# Altium PCB imuver3.PcbDoc
Units mm, origin at the board's own origin, x right, y up, seen from the top; angles counter-clockwise.
Board outline 58.29 x 47.24 mm, 2 copper layers (Top Layer, Bottom Layer); 68 components, 50 nets, 317 pads, 53 vias.
Unrouted connection lines stored in the file: 10.
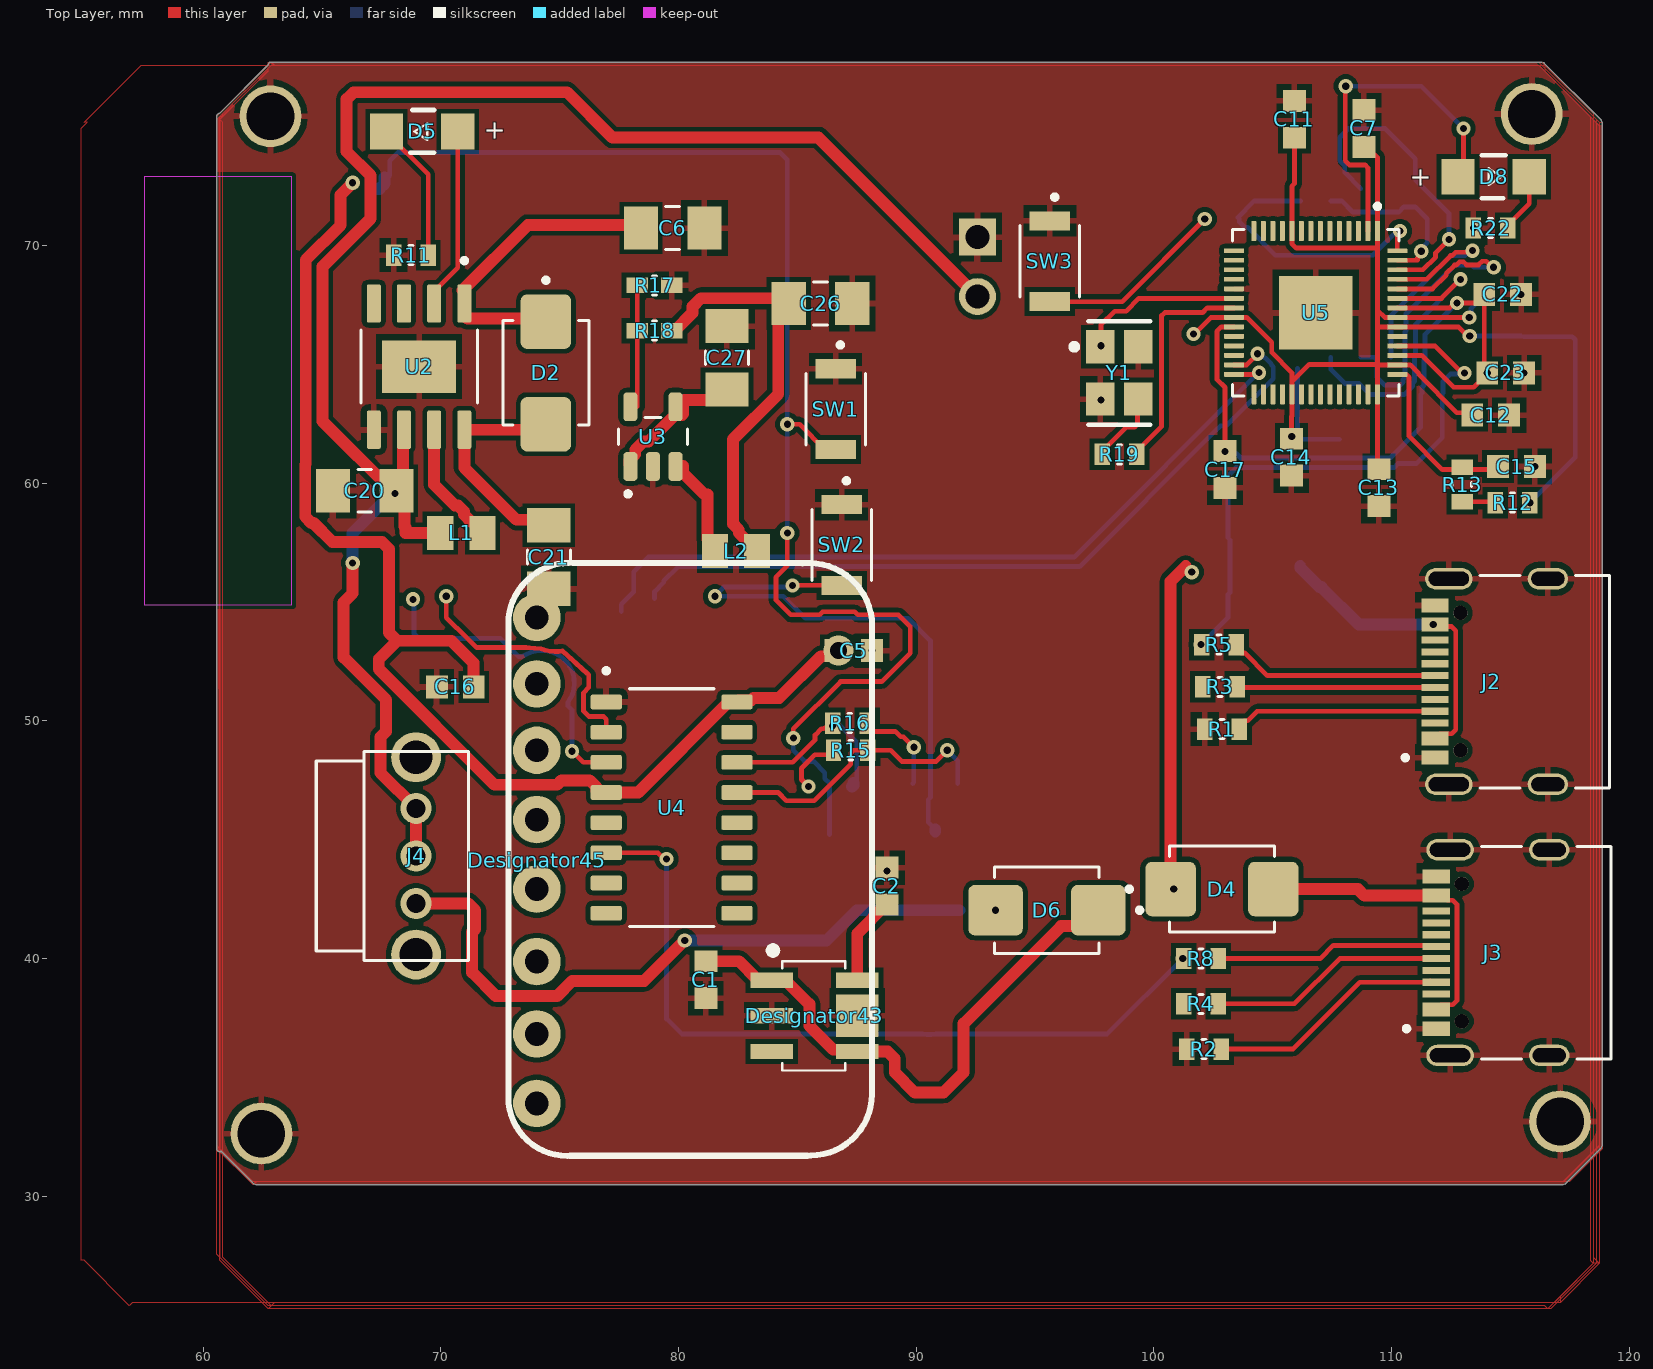
[diagram p0: Top Layer view]
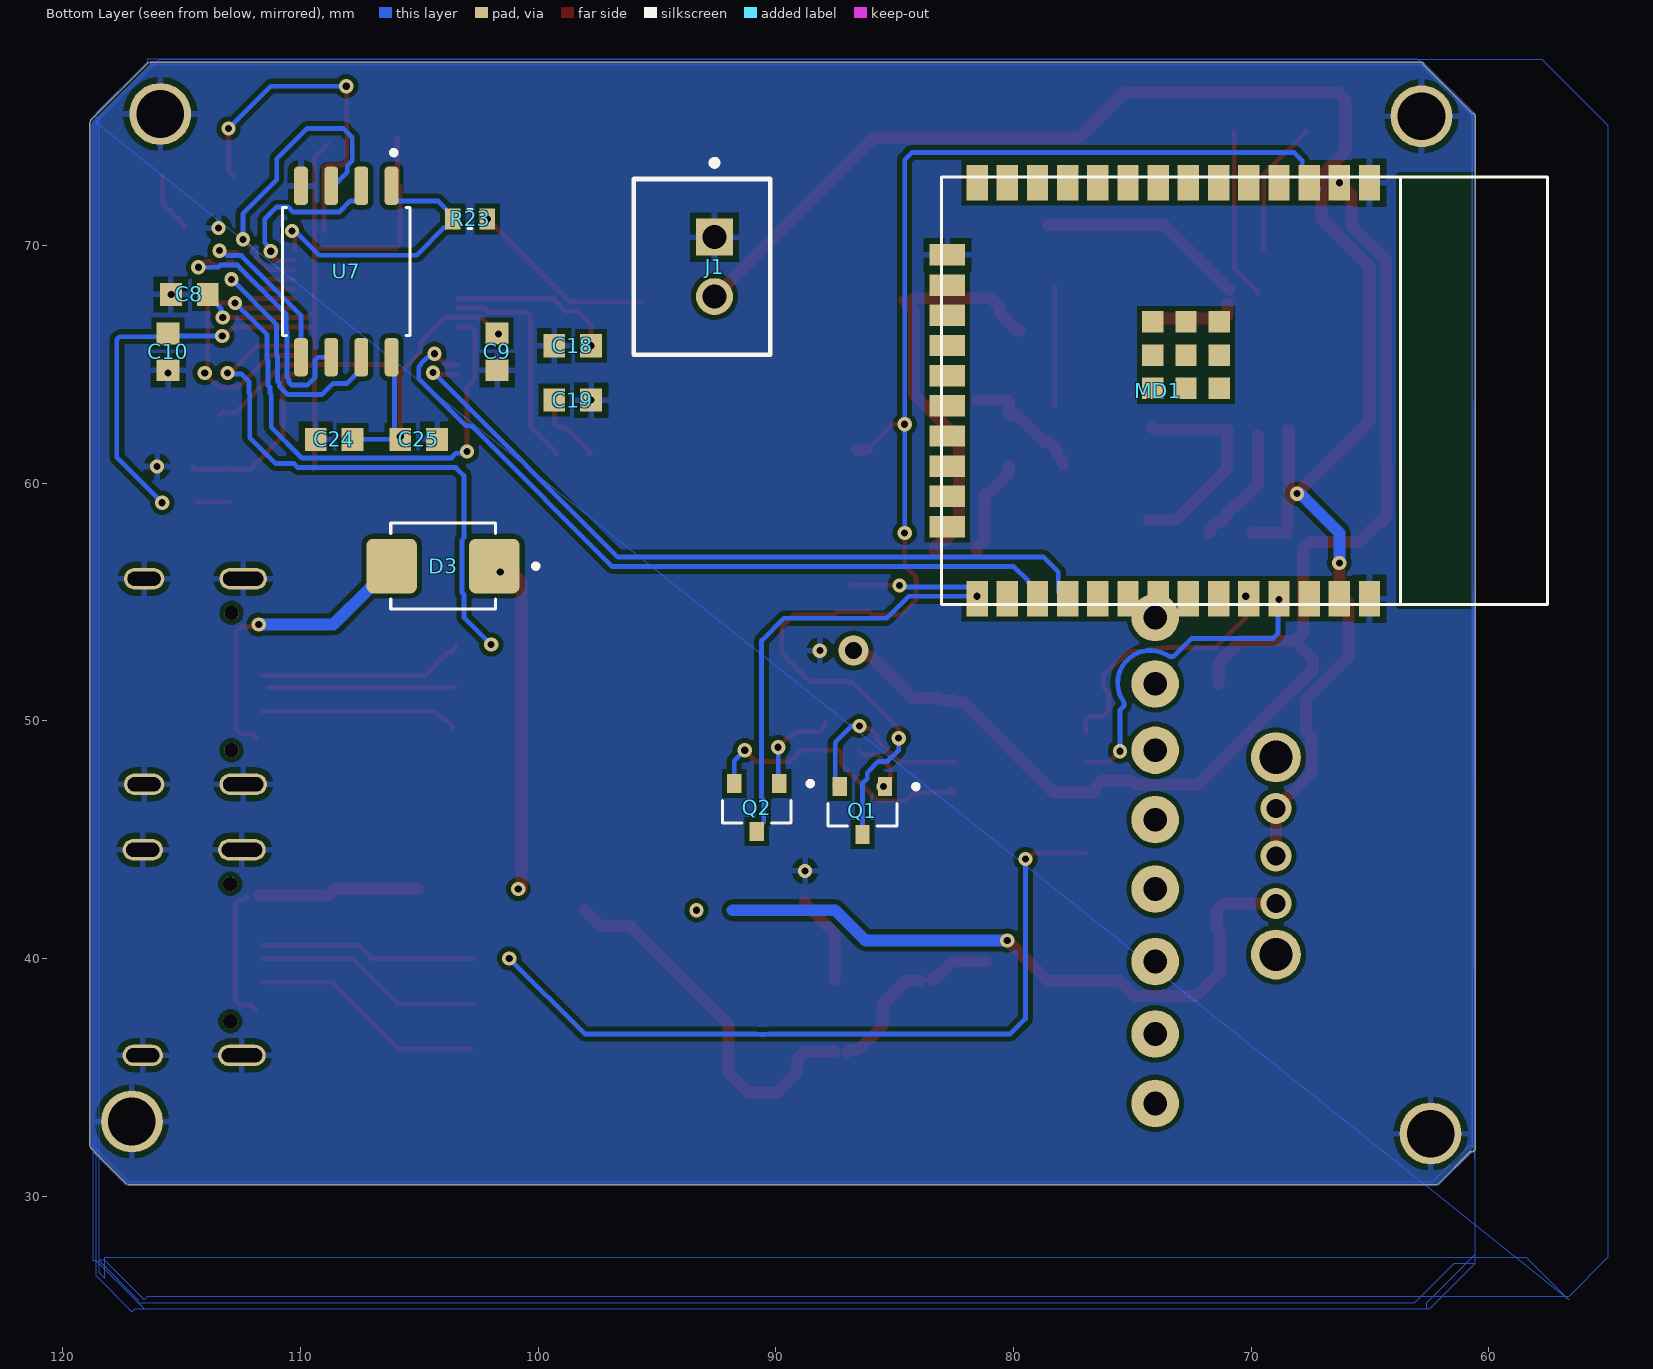
[diagram p1: Bottom Layer view, seen from below]
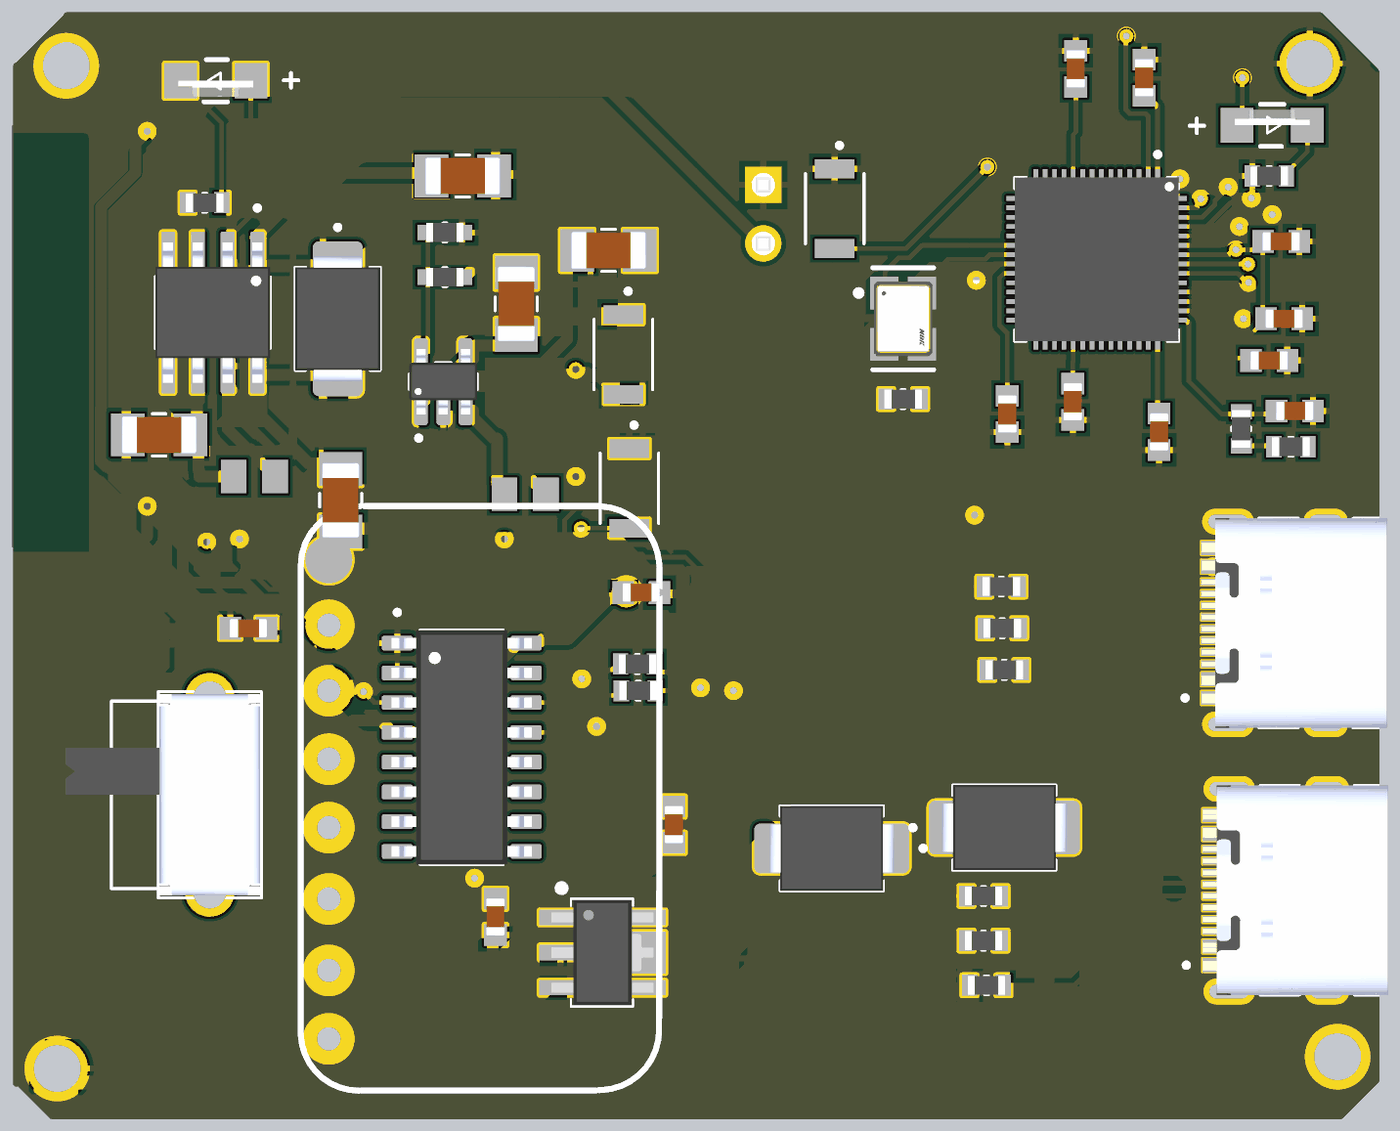
[diagram p2: 3D render of the assembled board from above, using the file's embedded part models]
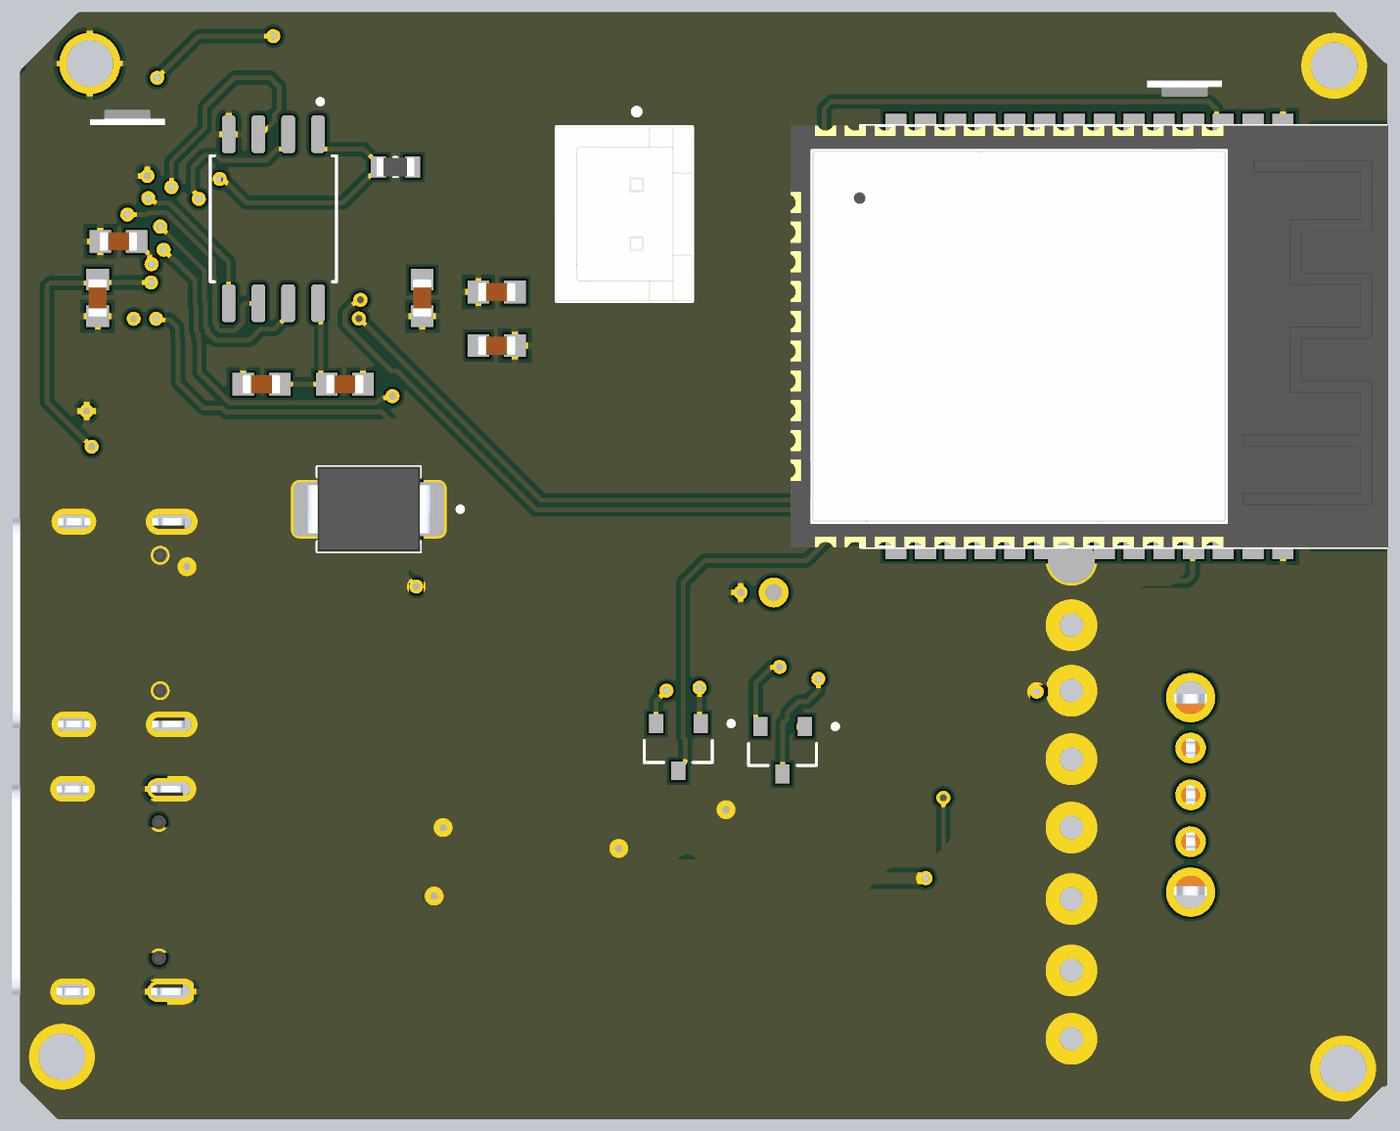
[diagram p3: 3D render of the assembled board from below, using the file's embedded part models]

## Layer stack, top to bottom
Top Solder: solder mask 0.0102, Solder Resist, Dk 3.5
Top Layer: signal copper 0.0356
Dielectric 1: dielectric 0.32, FR-4, Dk 4.8
Bottom Layer: signal copper 0.0356
Bottom Solder: solder mask 0.0102, Solder Resist, Dk 3.5

## Board outline
60.765,31.891 62.14,30.517 62.23,30.48 62.611,30.48 62.738,30.48 116.713,30.48 117.221,30.48 117.311,30.517 118.835,32.041 118.872,32.131 118.872,33.909 118.872,75.184 118.835,75.274 116.422,77.687 116.332,77.724 62.865,77.724 ccw(c62.865,77.597) 62.739,77.613 60.69,75.564 ccw(c60.706,75.438) 60.579,75.438 60.579,35.052 60.579,32.004 ccw(c60.706,32.004)

## Design rules (kind name [scope] priority, off if disabled: settings)
Clearance [All] p1: gap=0.2 ignorepadtopadclearanceinfootprint=FALSE
PolygonConnect [All] p1: connectstyle=Relief reliefconductorwidth=0.254 reliefentries=4 polygonreliefangle="90 Angle" airgapwidth=0.254
RoutingVias [All] p1: holewidth=0.711 width=1.27 viastyle="Through Hole" minholewidth=0.711 minwidth=1.27 maxholewidth=0.711 maxwidth=1.27
SolderMaskExpansion [All] p1: expansion=0.102 istentingtop=FALSE
Width [All] p1: maxlimit=0.5 minlimit=0.2 preferedwidth=0.2 minimp=50.000000 maximp=50.000000 favimp=50.000000
30 further rules are at their usual default settings.

## Classes and differential pairs
component class "schematic (upgrade)": C1 C2 C5 C6 C7 C8 C9 C10 C11 C12 C13 C14 C15 C16 C17 C18 C19 C20 C21 C22 C23 C24 C25 C26 C27 D2 D3 D4 D5 D8 J1 J2 J3 J4 L1 L2 MD1 Q1 Q2 R1 R2 R3 R4 R5 R8 R11 R12 R13 R15 R16 R17 R18 R19 R22 R23 SW1 SW2 SW3 U2 U3 U4 U5 U7 Y1

## Components (designator, comment, footprint, x,y, rotation, side; value= is the part's Value field where it differs from the comment)
C1 "10uF" CAPC1608X90N 81.153,39.116 r90 top
C2 "10uF" CAPC1608X90N 88.773,43.053 r270 top
C5 "100nF" CAPC1608X90N 87.376,52.959 r0 top
C6 "10uF" CAPC3216X190N 79.756,70.739 r180 top
C7 "100nF" CAPC1608X90N 108.839,74.93 r90 top
C8 "100nF" CAPC1608X90N 114.681,67.945 r0 bottom
C9 "100nF" CAPC1608X90N 101.727,65.532 r270 bottom
C10 "100nF" CAPC1608X90N 115.57,65.532 r270 bottom
C11 "100nF" CAPC1608X90N 105.918,75.311 r90 top
C12 "100nF" CAPC1608X90N 114.173,62.865 r0 top
C13 "100nF" CAPC1608X90N 109.474,59.817 r270 top
C14 "2.2uF" CAPC1608X90N 105.791,61.1 r90 top
C15 "2.2uF" CAPC1608X90N 115.263,60.706 r180 top
C16 "100nF" CAPC1608X90N 70.612,51.435 r0 top
C17 "2.2uF" CAPC1608X90N 102.997,60.579 r270 top
C18 "15pF" CAPC1608X90N 98.552,65.786 r0 bottom
C19 "15pF" CAPC1608X90N 98.552,63.5 r180 bottom
C20 "22uF" CAPC3216X190N 66.802,59.69 r0 top
C21 "22uF" CAPC3216X190N 74.549,56.896 r90 top
C22 "100nF" CAPC1608X90N 114.681,67.945 r0 top
C23 "100nF" CAPC1608X90N 114.808,64.643 r0 top
C24 "2.2uF" CAPC1608X90N 108.585,61.849 r180 bottom
C25 "100nF" CAPC1608X90N 105.029,61.849 r180 bottom
C26 "22uF" CAPC3216X190N 85.979,67.564 r0 top
C27 "22uF" CAPC3216X190N 82.042,65.278 r270 top
D2 "SS24" DIOM5336X265N#1 74.422,64.643 r270 top
D3 "SS24" DIOM5336X265N#2 104.005,56.515 r0 bottom
D4 "SS24" DIOM5336X265N#2 102.87,42.926 r0 top
D5 "PWR LED" WL-SMCW_1206 69.215,74.803 r0 top
D6 "SS24" DIOM5336X265N#1 95.504,42.037 r180 top
D8 "PWR LED" WL-SMCW_1206 114.3,72.898 r180 top
Designator43 "XC6222B331PR-G" SOT-89-5 85.725,37.592 r270 top
Designator45 "Comment" PCBComponent_1#1 84.963,42.672 r270 top
J1 "B2B-XH-A(LF)(SN)" FP-B2B-XH-A_LF_SN-MFG 93.108,69.108 r270 bottom
J2 "TYPE-C-31-M-12" HRO_TYPE-C-31-M-12 116.583,51.658 r90 top
J3 "TYPE-C-31-M-12" HRO_TYPE-C-31-M-12 116.637,40.255 r90 top
J4 "SK12D07VG4" SK12D07VG4 68.961,44.323 r270 top
L1 "2.2uH" INDC2012X55N 70.866,57.912 r180 top
L2 "2.2uH" INDC2012X55N 82.423,57.15 r0 top
MD1 "ESP32-WROOM-32E(M113EH3200PH3Q0)" ESP32-WROOM-32E 73.279,63.894 r270 bottom
MD2 "Module BNO055" PCBComponent_1#2 179.324,42.545 r90 top
Q1 "SS8050-G" TRANS_SS8050-G 86.36,46.228 r270 bottom
Q2 "SS8050-G" TRANS_SS8050-G 90.805,46.355 r270 bottom
R1 "5K1" RES_ERJU03J5R6V#1 102.87,49.657 r0 top
R2 "5K1" RES_ERJU03J5R6V#1 102.108,36.195 r0 top
R3 "22R" RES_ERJU03J5R6V#1 102.78,51.435 r0 top
R4 "22R" RES_ERJU03J5R6V#1 101.981,38.1 r0 top
R5 "22R" RES_ERJU03J5R6V#1 102.743,53.213 r0 top
R8 "22R" RES_ERJU03J5R6V#1 101.981,40.005 r0 top
R11 "1K" RES_ERJU03J5R6V#1 68.744,69.596 r180 top
R12 "200R" RES_ERJU03J5R6V#1 115.099,59.182 r180 top
R13 "1R" RES_ERJU03J5R6V#1 112.977,59.944 r90 top
R15 "10K" RES_ERJU03J5R6V#1 87.249,48.768 r180 top
R16 "10K" RES_ERJU03J5R6V#1 87.212,49.911 r0 top
R17 "100k" RES_ERJU03J5R6V#2 78.994,68.326 r180 top
R18 "453k" RES_ERJU03J5R6V#2 78.994,66.421 r0 top
R19 "1K" RES_ERJU03J5R6V#1 98.552,61.214 r180 top
R22 "pp" RES_ERJU03J5R6V#1 114.173,70.739 r180 top
R23 "1K" RES_ERJU03J5R6V#1 102.87,71.12 r0 bottom
SW1 "B3U-1000P" SW_B3U-1000P 86.614,63.119 r270 top
SW2 "B3U-1000P" SW_B3U-1000P 86.868,57.404 r270 top
SW3 "B3U-1000P" SW_B3U-1000P 95.631,69.342 r270 top
U2 "IP5306" SOP127P600X165-9N 69.088,64.909 r270 top
U3 "TLV62568DBVR" SOT95P280X145-5N 78.928,61.961 r90 top
U4 "CH340C" SOIC127P600X180-16N 79.712,46.355 r0 top
U5 "RP2040" QFN40P700X700X90-57N 106.813,67.18 r270 top
U7 "W25Q16JVSSIQ" SOIC127P790X216-8N 108.077,68.912 r270 bottom
Y1 "NX3225SA-12.000M-STD-CRS-2" FP-NX3225SA-MFG 98.552,64.643 r270 top

## Footprints (in the part's own frame and the unit in brackets; to place one, negate y for a bottom-side part, rotate by r counter-clockwise, add the part's x,y. Pads: shape width x height; smd on the part's side, far side on the other; paste and mask are expansions set on the pad)
CAPC1608X90N [mm]
  rect 0.92x0.97 smd: 1(-0.775,0) 2(0.775,0)
  body extent -0.8,-0.4 0.8,0.4, height 0.95
CAPC3216X190N [mm]
  rect 1.44x1.82 smd: 1(-1.336,0) 2(1.336,0)
  silkscreen extent -0.29,-0.9 0.29,0.9, body extent -1.6,-0.8 1.6,0.8, height 1.9
DIOM5336X265N#1 [mm]
  rrect25% 2.29x2.12 smd: A(2.16,0) C(-2.16,0)
  silkscreen extent -4,-1.81 2.2,1.81, body extent -2.67,-1.81 2.67,1.81, height 2.65
DIOM5336X265N#2 [mm]
  rrect25% 2.12x2.29 smd: A(2.16,0) C(-2.16,0)
  silkscreen extent -4,-1.81 2.2,1.81, body extent -2.67,-1.81 2.67,1.81, height 2.65
ESP32-WROOM-32E [mm]
  rect 1.5x0.9 smd paste+0 mask+0.102: 1(-8.75,8.255) 2(-8.75,6.985) 3(-8.75,5.715) 4(-8.75,4.445) 5(-8.75,3.175) 6(-8.75,1.905) 7(-8.75,0.635) 8(-8.75,-0.635) 9(-8.75,-1.905) 10(-8.75,-3.175) 11(-8.75,-4.445) 12(-8.75,-5.715) 13(-8.75,-6.985) 14(-8.75,-8.255) 25(8.75,-8.255) 26(8.75,-6.985) 27(8.75,-5.715) 28(8.75,-4.445) 29(8.75,-3.175) 30(8.75,-1.905) 31(8.75,-0.635) 32(8.75,0.635) 33(8.75,1.905) 34(8.75,3.175) 35(8.75,4.445) 36(8.75,5.715) 37(8.75,6.985) 38(8.75,8.255)
  rect 0.9x1.5 smd paste+0 mask+0.102: 15(-5.715,-9.505) 16(-4.445,-9.505) 17(-3.175,-9.505) 18(-1.905,-9.505) 19(-0.635,-9.505) 20(0.635,-9.505) 21(1.905,-9.505) 22(3.175,-9.505) 23(4.445,-9.505) 24(5.715,-9.505)
  rect 0.9x0.9 smd paste+0 mask+0.102: GND@39(-2.9,1.935) GND@40(-1.5,1.935) GND@41(-0.1,1.935) GND@42(-2.9,0.535) GND@43(-1.5,0.535) GND@44(-0.1,0.535) GND@45(-2.9,-0.865) GND@46(-1.5,-0.865) GND@47(-0.1,-0.865)
  Keep-Out Layer region: 9,9.555 -9,9.555 -9,15.745 9,15.745
  silkscreen extent -9,-9.75 9,15.75, body extent -9,-12.75 9,12.75, height 3.25
FP-B2B-XH-A_LF_SN-MFG [mm]
  rect 1.55x1.55 hole 1 paste-2539.97 mask+0: 1(-1.25,0.525)
  round 1.55 hole 1 paste-2539.97 mask+0: 2(1.25,0.525)
  silkscreen extent -4.5,-2.88 3.7,2.88, body extent -3.7,-2.88 3.7,2.88, height 7
FP-NX3225SA-MFG [mm]
  rect 1.4x1.2 smd paste+0 mask+0: 1(-1.1,-0.8) 2(1.1,-0.8) 3(1.1,0.8) 4(-1.1,0.8)
  silkscreen extent -2.17,-2.02 2.17,1.3, body extent -1.9,-1.5 1.9,1.5, height 0.25
HRO_TYPE-C-31-M-12 [mm]
  rect 0.6x1.14 smd mask+0.05: A1_B12(-3.2,4.75) A4_B9(-2.4,4.75) B1_A12(3.2,4.75) B4_A9(2.4,4.75)
  rect 0.3x1.14 smd mask+0.05: A5(-1.25,4.75) A6(-0.25,4.75) A7(0.25,4.75) A8(1.25,4.75) B5(1.75,4.75) B6(0.75,4.75) B7(-0.75,4.75) B8(-1.75,4.75)
  oval 0.9x2 hole 0.6 slot 1.7 at 90 deg: S1(-4.325,4.17) S2(4.325,4.17)
  oval 0.9x1.7 hole 0.6 slot 1.4 at 90 deg: S3(-4.325,0) S4(4.325,0)
  round 0.6 hole 0.6 unplated: ""(-2.89,3.68) ""(2.89,3.68)
  silkscreen extent -4.47,-2.6 4.47,6.1, body extent -4.47,-2.6 4.47,5.31, height 3.31
INDC2012X55N [mm]
  rect 1.1x1.42 smd: 1(-0.885,0) 2(0.885,0)
PCBComponent_1#1 [mm]
  round 2 hole 1 paste-2539.97: 1(-11.684,-10.922)
  round 2 hole 1: 2(-8.89,-10.922) 3(-6.096,-10.922) 4(-3.175,-10.922) 5(-0.254,-10.922) 6(2.794,-10.922) 7(5.842,-10.922) 8(8.763,-10.922)
  silkscreen extent -13.98,-12.12 10.98,3.19
PCBComponent_1#2 [mm]
QFN40P700X700X90-57N [mm]
  rrect25% 0.84x0.2 smd: 1(-3.435,2.6) 2(-3.435,2.2) 3(-3.435,1.8) 4(-3.435,1.4) 5(-3.435,1) 6(-3.435,0.6) 7(-3.435,0.2) 8(-3.435,-0.2) 9(-3.435,-0.6) 10(-3.435,-1) 11(-3.435,-1.4) 12(-3.435,-1.8) 13(-3.435,-2.2) 14(-3.435,-2.6) 29(3.435,-2.6) 30(3.435,-2.2) 31(3.435,-1.8) 32(3.435,-1.4) 33(3.435,-1) 34(3.435,-0.6) 35(3.435,-0.2) 36(3.435,0.2) 37(3.435,0.6) 38(3.435,1) 39(3.435,1.4) 40(3.435,1.8) 41(3.435,2.2) 42(3.435,2.6)
  rrect25% 0.2x0.84 smd: 15(-2.6,-3.435) 16(-2.2,-3.435) 17(-1.8,-3.435) 18(-1.4,-3.435) 19(-1,-3.435) 20(-0.6,-3.435) 21(-0.2,-3.435) 22(0.2,-3.435) 23(0.6,-3.435) 24(1,-3.435) 25(1.4,-3.435) 26(1.8,-3.435) 27(2.2,-3.435) 28(2.6,-3.435) 43(2.6,3.435) 44(2.2,3.435) 45(1.8,3.435) 46(1.4,3.435) 47(1,3.435) 48(0.6,3.435) 49(0.2,3.435) 50(-0.2,3.435) 51(-0.6,3.435) 52(-1,3.435) 53(-1.4,3.435) 54(-1.8,3.435) 55(-2.2,3.435) 56(-2.6,3.435)
  rect 3.1x3.1 smd paste-0.57: 57(0,0)
  silkscreen extent -4.57,-3.5 3.5,3.5, body extent -3.5,-3.5 3.5,3.5, height 0.9
RES_ERJU03J5R6V#1 [mm]
  rect 0.65x0.9 smd paste+0 mask+0.102: 1(-0.725,0) 2(0.725,0)
  silkscreen extent -0.08,-0.4 0.08,0.4, body extent -0.8,-0.4 0.8,0.4, height 0.45
RES_ERJU03J5R6V#2 [mm]
  rect 0.9x0.65 smd paste+0 mask+0.102: 1(-0.725,0) 2(0.725,0)
  silkscreen extent -0.08,-0.4 0.08,0.4, body extent -0.8,-0.4 0.8,0.4, height 0.45
SK12D07VG4 [mm]
  round 1.308 hole 0.8: 1(-2,0) 2(2,0) COM(0,0)
  round 2.1 hole 1.4: M1(-4.15,0) M2(4.15,0)
  silkscreen extent -4.4,-4.2 4.4,2.2, body extent -4.3,-6.15 4.3,2.15, height 4.7
SOIC127P600X180-16N [mm]
  rrect25% 1.31x0.62 smd: 1(-2.75,4.445) 2(-2.75,3.175) 3(-2.75,1.905) 4(-2.75,0.635) 5(-2.75,-0.635) 6(-2.75,-1.905) 7(-2.75,-3.175) 8(-2.75,-4.445) 9(2.75,-4.445) 10(2.75,-3.175) 11(2.75,-1.905) 12(2.75,-0.635) 13(2.75,0.635) 14(2.75,1.905) 15(2.75,3.175) 16(2.75,4.445)
  silkscreen extent -2.85,-5 1.78,5.85, body extent -3,-5 3,5, height 1.8
SOIC127P790X216-8N [mm]
  rrect50% 1.61x0.58 smd: 1(-3.605,1.905) 2(-3.605,0.635) 3(-3.605,-0.635) 4(-3.605,-1.905) 5(3.605,-1.905) 6(3.605,-0.635) 7(3.605,0.635) 8(3.605,1.905)
  silkscreen extent -5.1,-2.69 2.69,2.69
SOP127P600X165-9N [mm]
  rrect25% 1.61x0.59 smd: 1(-2.655,1.905) 2(-2.655,0.635) 3(-2.655,-0.635) 4(-2.655,-1.905) 5(2.655,-1.905) 6(2.655,-0.635) 7(2.655,0.635) 8(2.655,1.905)
  rect 2.21x3.1 smd paste-3: 9(0,0)
  silkscreen extent -4.56,-2.45 1.53,2.45, body extent -3,-2.45 3,2.45, height 1.65
SOT95P280X145-5N [mm]
  rrect50% 1.21x0.59 smd: 1(-1.255,0.95) 2(-1.255,0) 3(-1.255,-0.95) 4(1.255,-0.95) 5(1.255,0.95)
  silkscreen extent -2.51,-1.45 0.8,1.45, body extent -1.4,-1.45 1.4,1.45, height 1.45
SOT-89-5 [mm]
  rect 0.65x1.8 smd: 1(-1.5,-1.8) 2(0,-1.8) 3(1.5,-1.8) 4(1.5,1.8) 5(-1.5,1.8)
  rect 1.8x1.8 smd: EP(0,1.8)
  silkscreen extent -3.05,-2.05 2.3,1.3, body extent -2.25,-2.17 2.25,2.17, height 1.5
SW_B3U-1000P [mm]
  rect 0.8x1.7 smd: 1(-1.7,0) 2(1.7,0)
  silkscreen extent -2.8,-1.25 1.5,1.25
TRANS_SS8050-G [mm]
  rect 0.8x0.6 smd: 1(-1.01,0.95) 2(-1.01,-0.95) 3(1.01,0)
  silkscreen extent -1.11,-1.45 0.65,2.35
WL-SMCW_1206 [mm]
  rect 1.4x1.5 smd: 1(-1.5,0) 2(1.5,0)
  silkscreen extent -0.5,-0.9 0.5,0.9, body extent -1.6,-0.68 1.6,0, height 0.8

## Part data
C1 C2 C5 C7 C8 C9 C10 C11 C12 C13 C14 C15 C16 C17 C18 C19 C22 C23 C24 C25: library part C0603C104K4RAC, "0.1 ÂµF Â±10% 16V Ceramic Capacitor X7R 0603 (1608 Metric)", Package="603-2 KEMET", Check_prices=https://www.snapeda.com/parts/C0603C104K4RAC/KEMET/view-part/?ref=eda, MF=KEMET, MP=C0603C104K4RAC, SnapEDA_Link=https://www.snapeda.com/parts/C0603C104K4RAC/KEMET/view-part/?ref=snap
C6 C20 C21 C26 C27: library part CGA5L1X8L0G226M160AC, "22 ÂµF Â±20% 4V Ceramic Capacitor X8L 1206 (3216 Metric)", Package="3216 TDK", Check_prices=https://www.snapeda.com/parts/CGA5L1X8L0G226M160AC/TDK/view-part/?ref=eda, MF=TDK, MP=CGA5L1X8L0G226M160AC, SnapEDA_Link=https://www.snapeda.com/parts/CGA5L1X8L0G226M160AC/TDK/view-part/?ref=snap
D2 D3 D4 D6: "Diode Schottky 40V 2A Surface Mount DO-214AA (SMB)", Package="DO-214AA ON Semiconductor", Availability="In Stock", Check_prices=https://www.snapeda.com/parts/SS24/Onsemi/view-part/?ref=eda, MF="ON Semiconductor", MP=SS24, Price=None, SnapEDA_Link=https://www.snapeda.com/parts/SS24/Onsemi/view-part/?ref=snap
D5 D8: library part WL-SMCW_1206, "1206, Super Red Typ.(@20mA): 630nm, 60mcd, 1.9V, 140Â° AlInGaP", Package="1206 Wurth Electronics", Check_prices=https://www.snapeda.com/parts/150120SS75000/Wurth+Electronics/view-part/?ref=eda, MF="Wurth Electronics", MP=150120SS75000, SnapEDA_Link=https://www.snapeda.com/parts/150120SS75000/Wurth+Electronics/view-part/?ref=snap
J1: library part CMP-2000-05888-3, "CONN HEADER VERT 2POS 2.5MM", Color=Natural, Contact Resistance=20mR, Current Rating=3A, Housing Color=White, Insulation Resistance=1GR, Max Operating Temperature=85°C, Max Voltage Rating (AC)=250V, Min Operating Temperature=-25°C, Connector Type="Male Pin", Contact Material=Brass, Contact Plating=Tin, Contact Type="Male Pin", Depth=5.75mm, Fastening Type=Detent, Housing Material=Polyamide, Lead Free="Lead Free", Lead Pitch=2.5mm, Length=7.4mm, Max Current Rating=3A, Max Voltage Rating (DC)=250V, Mount="Through Hole", Number of Contacts=2, Number of Positions=2, Number of Rows=1, Orientation=Straight, Packaging=Bulk, Pitch=2.5mm, REACH SVHC="No SVHC", Series=XH, Termination=Solder, Voltage Rating=250V, Voltage Rating (AC)=250V, Wire/Cable Gauge=22AWG
J2 J3: "USB Connectors 24 Receptacle 1 8.94*7.3mm RoHS", Package=Package, Check_prices=https://www.snapeda.com/parts/TYPE-C-31-M-12/HRO+Electronics+Co.%252C+Ltd./view-part/?ref=eda, MF="HRO Electronics Co., Ltd.", MP=TYPE-C-31-M-12, SnapEDA_Link=https://www.snapeda.com/parts/TYPE-C-31-M-12/HRO+Electronics+Co.%252C+Ltd./view-part/?ref=snap
J4: "Switch Slide ON ON SPDT Side Slide 0.3A 30VDC PC Pins Bracket Mount/Through Hole Bulk", Package=None, Check_prices=https://www.snapeda.com/parts/SK12D07VG4/C%2526K/view-part/?ref=eda, MF=C&K, MP=SK12D07VG4, SnapEDA_Link=https://www.snapeda.com/parts/SK12D07VG4/C%2526K/view-part/?ref=snap
L1 L2: library part LQM21PN2R2MCHD, "Inductor with Inductance: 2.2uH Tol. +/-20%, Package: 0805 _2012_", Package="2012 Bourns", Digi-Key_Part_Number=490-15992-1-ND, Digi-Key_Purchase_URL=https://www.digikey.com/product-detail/en/murata-electronics/LQM21PN2R2MCHD/490-15992-1-ND/6800657?utm_source=snapeda&utm_medium=aggregator&utm_campaign=symbol, MF=Murata, MP=LQM21PN2R2MCHD, SnapEDA_Link=https://www.snapeda.com/parts/LQM21PN2R2MCHD/Murata%20Electronics%20North%20America/view-part/1498675/?ref=snap
MD1: library part CMP-194065-000012-1, "RX TXRX MOD WIFI TRACE ANT SMD"
MD2: library part Component_1, "Module 9 DOF BNO055 by Adafruit"
Q1 Q2: "Bipolar (BJT) Transistor NPN 25 V 1.5 A 100MHz 300 mW Surface Mount SOT-23-3", Package=None, Check_prices=https://www.snapeda.com/parts/SS8050G/Comchip/view-part/?ref=eda, Digi-Key_Part_Number=641-1790-2-ND, MF=Comchip, MP=SS8050G, SnapEDA_Link=https://www.snapeda.com/parts/SS8050G/Comchip/view-part/?ref=snap
R1 R2 R3 R4 R5 R8 R11 R12 R13 R15 R16 R17 R18 R19 R22 R23: library part ERJU03J5R6V, "0201 anti-sulfurated resistor 0603 Anti-Sulfurated", Package="1608-2 Panasonic", Check_prices=https://www.snapeda.com/parts/ERJ-U03J5R6V/Panasonic/view-part/?ref=eda, MF=Panasonic, MP=ERJ-U03J5R6V, SnapEDA_Link=https://www.snapeda.com/parts/ERJ-U03J5R6V/Panasonic/view-part/?ref=snap
SW1 SW2 SW3: "Switch Tactile N.O. SPST Round Button Gull Wing 0.05A 12VDC 1.5N SMD Embossed T/R", Package=None, Availability=Unavailable, MP=B3U-1000P, Price=None
U2: "Fully-Integrated Power Bank System-On-Chip with 2.1A charger, 2.4A discharger", Package="SOIC-4 INJOINIC", Check_prices=https://www.snapeda.com/parts/IP5306/Injoinic/view-part/?ref=eda, MF=Injoinic, MP=IP5306, SnapEDA_Link=https://www.snapeda.com/parts/IP5306/Injoinic/view-part/?ref=snap
U3: "2.5V-5.5V input, 1A high efficiency step-down buck converter in SOT23 and SOT563 package", Package="SOT-23-5 Texas Instruments", Check_prices=https://www.snapeda.com/parts/TLV62568DBVR/Texas+Instruments/view-part/?ref=eda, MF="Texas Instruments", MP=TLV62568DBVR, SnapEDA_Link=https://www.snapeda.com/parts/TLV62568DBVR/Texas+Instruments/view-part/?ref=snap
U4: "USB to serial chip CH340", Package=None, Availability="Not in stock", Check_prices=https://www.snapeda.com/parts/CH340C/WCH/view-part/?ref=eda, MF=WCH, MP=CH340C, Price=None, SnapEDA_Link=https://www.snapeda.com/parts/CH340C/WCH/view-part/?ref=snap
U5: "RP2040 chip for Raspberry Pi Pico - ARM® Cortex®-M0+ MCU 32-Bit", Package=None, Check_prices=https://www.snapeda.com/parts/RP2040/Raspberry+Pi/view-part/?ref=eda, MF="Raspberry Pi", MP=RP2040, SnapEDA_Link=https://www.snapeda.com/parts/RP2040/Raspberry+Pi/view-part/?ref=snap
U7: Package=None, Availability=Unavailable, MF="{'manufacturer': u'Winbond Electronics'}", MP=W25Q16JVSSIQ, Price=None
Y1: library part CMP-200220-000016-1, Case/Package=SMD/SMT, ESR (Equivalent Series Resistance)=120R, Frequency=12MHz, Frequency Stability=50ppm, Frequency Tolerance=15ppm, Load Capacitance=8pF, Max Operating Temperature=125°C, Min Operating Temperature=-40°C, Ratings=AEC-Q200, Height=0.024inch, Length=0.126inch, Mount="Surface Mount", Packaging="Tape and Reel", RoHS Compliant=Yes, Width=0.098inch

## Free pads (board coordinates)
  round 2.6 hole 2: 1(62.836,75.44) 2(62.455,32.641) 4(115.905,75.538) PG(117.094,33.147)

## Via types
v1: diameter 0.6, hole 0.3, Top Layer to Bottom Layer, 52 vias
v2: diameter 1.27, hole 0.711, Top Layer to Bottom Layer, 1 vias

## Nets (pads, with @x,y where several pads share a name; then routed paths per layer and width w, separated by ;. In a path a pad name is that pad's centre, name@x,y a point inside that pad or via, vN(x,y) a via of type N, cw(c..) or ccw(c..) an arc to the next point about the centre after c; other vN are vias at no path point)
+1V1: C15.2 C17.1 C22.1 C23.1 R13.2 U5.23 U5.43 U5.45 U5.50 | length 40.4
  Top Layer w0.2: v1(102.997,61.341) C17.1 102.997,64.031 102.658,64.37 102.658,66.39 102.848,66.58 103.014,66.58 U5.23 ; U5.43 110.627,64.58 110.744,64.463 110.744,61.976 112.141,60.579 112.887,60.579 R13.2 113.067,60.579 114.554,60.579 114.488,60.645 C15.2 ; U5.45 111.276,65.38 112.613,64.043 113.458,64.043 114.046,64.631 C23.1@114.046,64.643 ; U5.50 112.443,67.38 112.754,67.691 v1@112.756,67.691 ; v1(112.756,67.584) v1@112.756,67.691 ; C22.1@113.906,67.92 113.906,64.77 v1(114.033,64.643) ; C22.1 113.546,67.584 112.863,67.584 v1@112.756,67.691
  Bottom Layer w0.2: v1(102.997,61.341) 103.074,61.264 103.469,61.264 103.67,61.064 109.944,61.064 111.233,62.353 111.233,63.747 111.29,63.804 111.29,64.049 111.372,64.131 111.372,65.18 111.417,65.225 111.417,66.274 112.307,67.164 112.327,67.164 112.747,67.584 v1(112.756,67.584)
+3V3: C2.2 C7.1 C8.1 C9.1 C10.1 C11.1 C12.1 C13.1 C14.2 C24.2 C25.1 Designator43.5 R12.1 U5.1 U5.10 U5.22 U5.33 U5.42 U5.44 U5.48 U5.49 U7.8 | length 69.5
  Top Layer w0.2: v1(101.675,66.286) 101.719,66.286 102.413,66.98 U5.22 103.908,66.98 104.963,65.925 104.963,65.506 105.813,64.656 105.813,64.275 ; C14.2 105.791,62.813 105.813,62.835 U5.33 105.813,64.275 ; C11.1 105.918,72.608 105.813,72.503 U5.10 105.813,70.085 106.003,69.895 109.331,69.895 109.413,69.977 ; C7.1@108.839,74.282 109.413,73.708 U5.1 109.413,69.977 ; 109.413,64.928 U5.42 109.413,60.653 C13.1 ; 109.465,64.98 110.793,64.98 111.144,64.629 111.144,64.581 112.755,62.969 113.294,62.969 C12.1 ; v1(113.272,66.973) 113.265,66.98 U5.49 109.718,66.98 109.413,67.285 ; v1(113.293,66.193) 113.208,66.193 112.821,66.58 U5.48 109.508,66.58 109.413,66.675 ; 105.813,64.275 106.541,65.003 109.413,65.003 109.413,66.675 ; 109.413,66.675 109.413,67.285 ; 109.413,67.285 109.413,69.977
  Top Layer w0.5: Designator43.5 87.525,41.055 88.773,42.303 C2.2@88.773,42.418
  Bottom Layer w0.2: U7.8@106.045,64.83 106.045,62.09 C25.1 C24.2 ; v1(113.272,66.973) 113.349,67.05 113.349,67.363 113.906,67.92 C8.1 ; v1(113.293,66.193) C10.1@115.456,66.193 ; C10.1@115.57,66.167 117.612,66.167 117.729,66.05 117.729,61.087 v1(115.824,59.182)
  other v1: 105.804,61.976
+3V3_ESP: C5.1 C16.2 C26.1 L2.2 MD1.2 R18.2 U4.4 U4.16 | length 70.6
  Top Layer w0.2: U4.16@82.117,50.8 U4.16
  Top Layer w0.5: v1(66.294,72.644) 65.786,72.136 65.786,70.866 64.319,69.399 64.319,60.809 64.296,60.786 64.296,58.594 64.56,58.33 64.645,58.33 65.444,57.531 67.525,57.531 67.818,57.238 67.818,53.721 68.164,53.375 ; C16.2@71.374,51.562 71.374,52.451 70.45,53.375 68.164,53.375 ; R18.2 79.844,66.421 80.592,67.169 80.592,67.43 80.946,67.784 84.173,67.784 84.455,67.502 C26.1@84.455,67.437 ; U4.16@82.117,50.8 78.307,46.99 U4.4 76.617,46.99 76.557,47.05 76.557,47.207 76.264,47.5 75.078,47.5 74.896,47.318 72.259,47.318 67.39,52.187 67.39,52.601 68.164,53.375 ; U4.16 82.522,50.86 83.052,50.86 83.16,50.968 84.242,50.968 85.998,52.724 86.391,52.724 v1(86.601,52.934) 86.716,52.934 v2(86.741,52.959) ; L2.2 83.308,57.31 83.008,57.61 82.848,57.61 82.538,57.92 82.538,58.046 82.296,58.288 82.296,61.849 84.201,63.754 84.201,67.31 C26.1@84.391,67.501 ; C26.1@84.549,67.658 C26.1@84.582,67.691
+5V: C1.2 C6.2 D2.C D3.C D4.C D6.C Designator43.1 Designator43.4 U2.1 | length 49.9
  Top Layer w0.5: U2.1@70.915,68.121 73.66,70.866 C6.2@78.547,70.866 ; U2.1 70.993,67.054 71.118,66.929 D2.C@74.295,66.929 ; C1.2 82.551,39.891 83.326,39.116 Designator43.1@83.439,39.116 ; Designator43.1 84.5,39.092 85.507,38.085 85.507,37.174 86.514,36.167 86.896,36.167 Designator43.4@86.995,36.068 ; Designator43.4 87.528,36.089 88.808,36.089 89.101,35.797 89.101,35.213 89.95,34.364 91.152,34.364 92.001,35.213 92.001,37.264 96.102,41.365 97.372,41.365 D6.C@98.039,42.032 ; D4.C 100.71,55.879 101.346,56.515
  other v1: 100.838,42.926 101.6,56.261
+5V_OUT: C21.2 D2.A D6.A J4.2 U2.8 | length 36.7
  Top Layer w0.5: J4.2 71.155,42.323 71.448,42.03 71.448,41.241 71.321,41.114 71.321,39.423 72.316,38.428 74.896,38.428 75.531,39.063 78.56,39.063 v1(80.264,40.767) ; D2.A@74.168,62.357 74.065,62.254 U2.8 70.993,60.654 73.182,58.465 C21.2@74.316,58.465
  Bottom Layer w0.5: v1(80.264,40.767) 86.233,40.767 87.503,42.037 91.821,42.037
  other v1: 93.345,42.037
+BATT: C20.2 J1.2 J4.1 J4.COM L1.2 U2.6 | length 72.7
  Top Layer w0.5: v1(66.294,56.642) 66.294,55.372 65.913,54.991 65.913,52.674 67.702,50.885 67.702,49.564 67.461,49.323 67.461,47.823 J4.1 J4.COM ; C20.2@68.041,59.594 65.024,62.611 65.024,69.114 67.044,71.134 67.044,72.955 66.04,73.959 66.04,76.161 66.333,76.454 75.317,76.454 77.222,74.549 85.892,74.549 J1.2 ; C20.2@68.199,59.436 68.408,59.645 68.408,62.209 U2.6 ; C20.2@68.481,59.22 68.481,58.185 68.518,58.148 68.518,57.912 L1.2
  Bottom Layer w0.5: v1(66.294,56.642) 66.294,57.912 67.945,59.563 v1(68.072,59.563)
GND: C1.1 C2.1 C5.2 C6.1 C7.2 C8.2 C9.2 C10.2 C11.2 C12.2 C13.2 C14.1 C15.1 C16.1 C17.2 C18.2 C19.2 C20.1 C21.1 C22.2 C23.2 C24.1 C25.2 C26.2 C27.1 Designator43.2 Designator43.EP J1.1 J2.A1_B12 J2.B1_A12 J2.S1 J2.S2 J2.S3 J2.S4 J3.A1_B12 J3.B1_A12 J3.S1 J3.S2 J3.S3 J3.S4 MD1.1 MD1.15 MD1.38 pad.1 pad.2 pad.4 pad.PG R1.1 R2.1 R11.2 R17.1 R22.2 SW1.1 SW2.1 SW3.1 U2.5 U2.9 U3.2 U4.1 U5.19 U5.57 U7.4 Y1.2 Y1.4
  other v1: 88.773,43.688 88.151,52.959 116.038,60.706 97.777,63.5 115.583,64.643 115.443,67.945 113.448,70.739
NetC18_1: C18.1 U5.20 Y1.1 | length 6.9
  Top Layer w0.2: v1(97.777,65.786) 97.777,66.662 98.357,67.242 98.833,67.242 99.371,67.78 U5.20
NetC19_1: C19.1 R19.2 Y1.3 | length 3.1
  Top Layer w0.2: R19.2 97.827,61.339 98.845,62.357 99.197,62.357 99.314,62.474 Y1.3@99.314,63.5
NetC27_2: C27.2 U3.1 U3.4 | length 5.2
  Top Layer w0.5: U3.1@77.933,60.798 77.933,60.971 78.183,61.221 78.183,61.411 78.533,61.761 78.747,61.761 79.862,62.876 80.148,62.876 80.198,62.926 80.198,63.45 80.248,63.5 C27.2@81.531,63.5
NetD3_A: D3.A J2.A4_B9 J2.B4_A9 | length 12.9
  Top Layer w0.2: J2.B4_A9@111.76,53.975 112.522,53.975 112.703,53.794 112.703,49.634 112.527,49.458 112.033,49.458 J2.A4_B9
  Bottom Layer w0.5: D3.A 106.165,56.439 106.974,55.63 107.051,55.63 108.623,54.058 v1(111.76,54.058)
NetD4_A: D4.A J3.A4_B9 J3.B4_A9 | length 12.7
  Top Layer w0.2: J3.A4_B9 112.087,38.055 112.581,38.055 112.757,38.231 112.757,42.279 112.581,42.455 112.357,42.455 112.268,42.544 J3.B4_A9@112.268,42.672
  Top Layer w0.5: D4.A 108.592,42.926 108.863,42.655 111.743,42.655 J3.B4_A9@111.76,42.672
NetD5_1: D5.1 R11.1 | length 5.7
  Top Layer w0.2: D5.1 67.715,74.753 69.469,72.999 R11.1@69.469,69.85
NetD5_2: D5.2 U2.2 | length 7.3
  Top Layer w0.2: U2.2@69.723,67.945 69.723,68.074 70.715,69.066 D5.2
NetD8_1: D8.1 R22.1 | length 2.5
  Top Layer w0.2: R22.1 114.898,70.864 115.8,71.766 D8.1
NetD8_2: D8.2 U5.2 | length 14.7
  Top Layer w0.2: v1(108.077,76.708) 108.058,76.689 108.058,76.293 108.054,76.289 108.054,73.571 108.23,73.395 108.896,73.395 109.013,73.278 U5.2 ; D8.2 113.03,73.128 v1(113.03,74.93)
  Bottom Layer w0.2: v1(108.077,76.708) 111.252,76.708 v1(113.03,74.93)
NetJ2_A5: J2.A5 R1.2 | length 8.4
  Top Layer w0.2: R1.2 103.595,49.782 103.82,50.007 103.945,50.007 104.346,50.408 111.622,50.408 J2.A5@111.633,50.419
NetJ2_A6: J2.A6 R3.2 | length 7.9
  Top Layer w0.2: R3.2 103.532,51.408 111.363,51.408 111.379,51.424 J2.A6@111.379,51.435
NetJ2_A7: J2.A7 R5.2 | length 8.8
  Top Layer w0.2: R5.2 103.468,53.088 103.693,52.863 103.818,52.863 104.773,51.908 111.598,51.908 J2.A7@111.633,51.943
NetJ3_A5: J3.A5 R2.2 | length 10
  Top Layer w0.2: R2.2 105.857,36.195 108.667,39.005 111.583,39.005 J3.A5@111.633,39.055
NetJ3_A6: J3.A6 R4.2 | length 9.7
  Top Layer w0.2: R4.2 105.918,38.1 107.823,40.005 J3.A6@111.633,40.005
NetJ3_A7: J3.A7 R8.2 | length 9.2
  Top Layer w0.2: R8.2 107.007,40.005 107.557,40.555 J3.A7@111.633,40.555
NetL1_1: L1.1 U2.7 | length 5.3
  Top Layer w0.2: L1.1 L1.1@71.845,58.006
  Top Layer w0.5: U2.7@69.723,62.034 69.723,59.94 70.591,59.072 70.717,59.072 70.981,58.808 70.981,58.682 71.291,58.372 71.451,58.372 71.751,58.072 L1.1
NetL2_1: L2.1 U3.3 | length 4.2
  Top Layer w0.5: 80.198,60.726 80.198,60.426 81.087,59.537 81.22,59.537 81.22,57.628 81.538,57.31 L2.1
NetMD1_3: MD1.3 Q1.3 SW1.2 | length 58.8
  Top Layer w0.2: v1(84.582,57.912) 84.582,56.528 84.101,56.047 84.101,55.091 84.725,54.467 85.937,54.467 86.064,54.594 87.418,54.594 87.545,54.467 89.257,54.467 89.754,53.97 89.754,52.854 88.558,51.657 86.822,51.657 84.836,49.671 v1(84.836,49.276) ; v1(84.582,62.484) 85.099,62.484 SW1.2@86.164,61.419
  Top Layer w0.5: SW1.2@86.164,61.419 SW1.2
  Bottom Layer w0.2: MD1.3 67.859,72.939 67.859,73.574 68.199,73.914 84.289,73.914 84.582,73.621 v1(84.582,62.484) v1(84.582,57.912) ; v1(84.836,49.276) 84.836,48.768 85.308,48.296 85.688,48.296 86.16,47.824 86.16,47.571 86.36,47.371 Q1.3
  Bottom Layer w0.5: MD1.3@67.31,72.39 67.417,72.39 67.637,72.61 MD1.3@67.637,72.876
NetMD1_25: MD1.25 Q2.3 SW2.2 | length 23.6
  Top Layer w0.2: v1@84.808,55.711 SW2.2@86.861,55.711
  Bottom Layer w0.2: MD1.25 81.635,55.245 84.411,55.245 85.335,54.321 89.665,54.321 90.605,53.381 90.605,46.779 90.512,46.686 90.512,45.738 Q2.3@90.805,45.445 ; v1(81.534,55.245) 81.534,55.267 81.9,55.633 84.73,55.633 v1(84.801,55.704)
  Bottom Layer w0.5: Q2.3 Q2.3@90.805,45.445
NetMD1_27: MD1.27 U5.27 | length 32.7
  Top Layer w0.2: U5.27 103.908,64.98 104.365,65.438 v1(104.365,65.451)
  Bottom Layer w0.2: MD1.27 78.994,55.444 79.387,55.837 79.387,55.892 79.99,56.495 96.881,56.495 102.547,62.161 102.547,62.162 102.811,62.426 103.051,62.426 105.03,64.405 105.03,64.902 104.945,64.987 104.945,65.024 104.691,65.278 104.647,65.278 104.474,65.451 v1(104.365,65.451)
NetMD1_28: MD1.28 U5.28 | length 32.7
  Top Layer w0.2: U5.28 104.356,64.58 v1(104.43,64.654)
  Bottom Layer w0.2: MD1.28@77.597,54.61 77.597,54.91 78.117,55.43 78.117,56.273 78.739,56.895 96.646,56.895 104.405,64.654 v1(104.43,64.654)
NetMD1_34: MD1.34 U4.2 | length 11.1
  Top Layer w0.2: v1(70.231,55.245) 70.231,54.338 70.643,53.925 70.678,53.925 71.517,53.086 73.6,53.086 73.942,53.06 ccw(c74.041,54.356) 73.965,53.058 74.226,53.042 ccw(c74.794,54.298) 74.794,52.919 ccw(c74.794,55.264) 75.12,52.942 76.166,51.998 76.228,51.936 76.228,51.41 76.007,51.189 76.007,50.411 76.228,50.19 76.845,50.19 76.962,50.073 U4.2
NetMD1_35: MD1.35 U4.3 | length 14.1
  Top Layer w0.2: v1(75.524,48.727) 75.991,48.26 U4.3
  Bottom Layer w0.2: v1(68.834,55.118) MD1.35 68.878,55.1 68.878,53.677 69.088,53.467 72.517,53.467 73.277,52.707 73.409,52.707 73.608,52.811 cw(c74.247,51.597) 75.358,50.791 75.358,50.729 75.358,50.626 75.399,50.585 75.524,50.46 v1(75.524,48.727)
NetMD2_4: U5.38
NetMD2_5: U5.39
NetQ1_1: Q1.1 R15.2 | length 2.5
  Top Layer w0.2: v1(85.471,47.244) 85.178,47.537 85.178,48.013 85.74,48.575 86.331,48.575 R15.2
NetQ1_2: Q1.2 R16.1 U4.14 | length 8
  Top Layer w0.2: U4.14 84.81,48.26 85.749,49.199 85.749,49.404 86.013,49.668 86.119,49.668 86.162,49.711 R16.1@86.414,49.711
  Top Layer w0.5: R16.1@86.414,49.711 v1(86.487,49.784)
  Bottom Layer w0.2: v1(86.487,49.784) 86.822,49.784 87.503,49.103 87.503,47.531 Q1.2@87.36,47.388
  Bottom Layer w0.5: Q1.2 87.36,47.288 Q1.2@87.36,47.388
NetQ2_1: Q2.1 R16.2 | length 4
  Top Layer w0.2: R16.2 87.937,49.786 88.162,49.561 89.123,49.561 89.352,49.332 89.467,49.332 v1(89.904,48.895)
  Bottom Layer w0.2: Q2.1 89.904,47.414 v1(89.904,48.895)
NetQ2_2: Q2.2 R15.1 U4.13 | length 12.3
  Top Layer w0.2: U4.13 84.195,46.99 84.541,46.644 85.72,46.644 87.249,48.173 87.249,48.651 87.366,48.768 R15.1 88.926,48.768 89.399,48.295 90.84,48.295 v1(91.313,48.768) ; U4.13@82.55,47.117 U4.13@82.68,47.117
  Bottom Layer w0.2: v1(91.313,48.768) 91.755,48.326 Q2.2
NetR5_1: R5.1 U5.46 | length 24.1
  Top Layer w0.2: U5.46 111.832,65.78 112.969,64.643 v1(113.073,64.643)
  Bottom Layer w0.2: v1(101.981,53.213) 103.124,54.356 103.124,55.32 103.205,55.401 103.205,57.63 103.124,57.711 103.124,60.325 103.463,60.664 110.11,60.664 110.279,60.833 111.056,60.833 112.141,61.918 112.141,63.769 112.172,63.8 112.172,64.293 112.473,64.594 112.888,64.594 v1@113.03,64.736
NetR8_1: R8.1 U4.6 | length 32.7
  Top Layer w0.2: U4.6 79.14,44.45 79.394,44.196 v1(79.502,44.196)
  Bottom Layer w0.2: v1(79.502,44.196) 79.502,37.465 80.137,36.83 90.273,36.83 ccw(c90.551,38.1) 90.829,36.83 98.044,36.83 v1(101.219,40.005)
NetR12_2: R12.2 R13.1 | length 1.4
  Top Layer w0.2: R13.1 114.337,59.219 R12.2
NetR17_2: R17.2 R18.1 U3.5 | length 5.1
  Top Layer w0.2: U3.5@78.269,63.226 R18.1 R17.2
NetR19_1: R19.1 U5.21 | length 9.5
  Top Layer w0.2: R19.1 99.277,61.339 100.33,62.392 100.33,67.056 100.457,67.183 102.05,67.183 102.247,67.38 U5.21
NetR23_1: R23.1 SW3.2 | length 8
  Top Layer w0.2: SW3.2 98.667,67.642 v1(102.145,71.12)
NetR23_2: R23.2 U5.56 U7.1 | length 11.5
  Top Layer w0.2: U5.56 110.248,70.389 110.344,70.485 v1@110.363,70.485
  Bottom Layer w0.2: R23.2@103.532,71.182 104.232,71.882 U7.1@106.172,71.882 ; R23.2 103.595,70.995 103.82,70.77 103.945,70.77 105.119,69.596 109.22,69.596 110.159,70.535 110.178,70.535 110.236,70.593 v1@110.236,70.612
  other v1: 110.363,70.612
NetU4_5: U4.5
NetU5_47: U5.47
NetU5_51: U5.51 U7.7 | length 12.9
  Top Layer w0.2: U5.51 112.103,67.78 v1(112.903,68.58)
  Bottom Layer w0.2: U7.7 107.442,64.792 108.032,64.202 108.632,64.202 109.099,63.735 110.539,63.735 110.89,64.086 110.89,64.215 110.972,64.297 110.972,65.346 111.017,65.391 111.017,66.694 v1(112.903,68.58)
NetU5_52: U5.52 U7.6 | length 15.2
  Top Layer w0.2: U5.52 111.724,68.18 112.303,68.759 112.303,68.829 112.654,69.18 112.724,69.18 112.865,69.321 113.03,69.321 113.162,69.189 113.66,69.189 113.813,69.342 113.983,69.342 114.237,69.088 v1(114.3,69.088)
  Bottom Layer w0.2: U7.6 109.275,65.307 109.392,65.19 109.392,64.463 109.72,64.135 110.373,64.135 110.49,64.252 110.49,64.381 110.572,64.463 110.572,66.376 110.617,66.421 110.617,67.143 112.654,69.18 113.377,69.18 113.469,69.088 v1(114.3,69.088) v1@114.427,69.088
NetU5_53: U5.53 U7.5 | length 10
  Top Layer w0.2: U5.53 111.489,68.58 112.489,69.58 112.558,69.58 112.699,69.721 113.343,69.721 v1(113.411,69.789)
  Bottom Layer w0.2: U7.5 109.982,67.073 112.489,69.58 113.094,69.58 113.237,69.723 v1@113.411,69.723
NetU5_54: U5.54 U7.3 | length 13.2
  Top Layer w0.2: U5.54 111.323,68.98 111.855,69.512 111.855,69.696 v1(112.422,70.263)
  Bottom Layer w0.2: U7.3@108.712,72.397 108.032,73.077 108.032,73.361 107.823,73.57 107.823,74.549 108.077,74.803 108.077,74.813 108.194,74.93 109.728,74.93 110.998,73.66 110.998,72.774 112.422,71.35 v1(112.422,70.263)
NetU5_55: U5.55 U7.2 | length 7.3
  Top Layer w0.2: U5.55 111.097,69.38 111.097,69.494 111.255,69.652 v1(111.255,69.76)
  Bottom Layer w0.2: U7.2@107.442,71.882 107.913,71.882 108.383,71.412 110.311,71.412 110.527,71.628 110.998,71.628 111.506,71.12 111.506,70.12 111.255,69.869 v1(111.255,69.76)
pads on no net: Designator43.3 Designator45.1 Designator45.2 Designator45.3 Designator45.4 Designator45.5 Designator45.6 Designator45.7 Designator45.8 J2. J2.A8 J2.B5 J2.B6 J2.B7 J2.B8 J3. J3.A8 J3.B5 J3.B6 J3.B7 J3.B8 J4.M1 J4.M2 MD1.4 MD1.5 MD1.6 MD1.7 MD1.8 MD1.9 MD1.10 MD1.11 MD1.12 MD1.13 MD1.14 MD1.16 MD1.17 MD1.18 MD1.19 MD1.20 MD1.21 MD1.22 MD1.23 MD1.24 MD1.26 MD1.29 MD1.30 MD1.31 MD1.32 MD1.33 MD1.36 MD1.37 MD1.GND@39 MD1.GND@40 MD1.GND@41 MD1.GND@42 MD1.GND@43 MD1.GND@44 MD1.GND@45 MD1.GND@46 MD1.GND@47 R3.1 R4.1 U2.3 U2.4 U4.7 U4.8 U4.9 U4.10 U4.11 U4.12 U4.15 U5.3 U5.4 U5.5 U5.6 U5.7 U5.8 U5.9 U5.11 U5.12 U5.13 U5.14 U5.15 U5.16 U5.17 U5.18 U5.24 U5.25 U5.26 U5.29 U5.30 U5.31 U5.32 U5.34 U5.35 U5.36 U5.37 U5.40 U5.41

## Polygon pours and split planes (outlines as drawn)
GND on Top Layer "GND_L01_P019" (solid, remove dead copper, pour order 19): 60.579,75.311 62.865,77.597 62.865,77.724 116.078,77.724 118.745,75.057 118.872,75.057 118.872,32.131 117.221,30.48 62.23,30.48 60.833,31.877 60.579,31.877
GND on Top Layer "NONET_L01_P018" (solid, remove dead copper, shelved, pour order 18): 60.579,75.438 62.738,77.597 62.738,77.724 116.205,77.724 118.745,75.184 118.872,75.184 118.872,32.004 117.475,30.607 62.23,30.607 62.103,30.48 60.579,32.004 60.579,32.131
GND on Top Layer "NONET_L01_P012" (solid, remove dead copper, shelved, pour order 12): 60.579,75.311 62.865,77.597 116.332,77.597 118.745,75.184 118.745,32.131 117.221,30.607 62.103,30.607 60.579,32.131
GND on Top Layer "NONET_L01_P009" (solid, remove dead copper, shelved, pour order 9): 60.706,75.438 62.738,77.47 62.738,77.724 116.332,77.724 118.491,75.565 118.491,27.432 118.745,27.178 117.094,25.527 62.992,25.527 62.738,25.273 60.706,27.305 60.706,27.559
no net on Top Layer "NONET_L01_P005" (solid, remove dead copper, shelved, pour order 5): 60.833,75.438 60.833,75.565 62.865,77.597 116.332,77.597 118.618,75.311 118.618,27.178 116.713,25.273 62.738,25.273 60.706,27.305 60.706,75.438
no net on Top Layer "NONET_L01_P004" (solid, remove dead copper, shelved, pour order 4): 60.673,75.297 62.738,77.362 62.738,77.597 116.205,77.597 118.491,75.311 118.491,27.178 116.84,25.527 62.992,25.527 62.865,25.4 60.833,27.432 60.833,75.184 60.706,75.311 60.706,27.432
GND on Top Layer "NONET_L01_P002" (solid, remove dead copper, shelved, pour order 2): 54.991,75.184 57.404,77.597 116.205,77.597 118.364,75.438 118.364,27.305 118.491,27.178 117.094,25.781 117.094,25.527 57.023,25.527 56.896,25.4 54.991,27.305 54.864,27.305 54.864,74.93 55.118,75.184
GND on Top Layer "NONET_L01_P006" (solid, remove dead copper, shelved, pour order 6): 60.579,75.438 62.865,77.724 62.992,77.597 116.459,77.597 116.459,77.343 118.745,75.057 118.745,27.178 118.491,27.178 116.586,25.273 116.459,25.4 62.738,25.4 60.579,27.559
GND on Bottom Layer "GND_L02_P020" (solid, remove dead copper, pour order 20): 60.579,75.565 62.738,77.724 116.332,77.724 116.332,77.597 118.872,75.057 118.872,32.131 117.221,30.48 62.103,30.48 62.103,30.607 60.579,32.131
GND on Bottom Layer "NONET_L02_P014" (solid, remove dead copper, shelved, pour order 14): 60.579,75.438 62.865,77.724 116.205,77.724 118.618,75.311 118.618,32.258 118.745,32.131 117.221,30.607 62.357,30.607 60.833,32.131 60.579,32.131
GND on Bottom Layer "NONET_L02_P013" (solid, remove dead copper, shelved, pour order 13): 62.865,77.597 116.332,77.597 118.745,75.184 118.745,31.877 117.348,30.48 62.103,30.48 60.579,32.004 60.706,32.131 60.706,75.438 60.706,32.131 60.706,75.438
GND on Bottom Layer "NONET_L02_P010" (solid, remove dead copper, shelved, pour order 10): 60.579,75.438 62.992,77.851 116.459,77.851 116.459,77.724 118.618,75.565 118.618,26.67 117.094,25.146 116.967,25.273 62.484,25.273 60.579,27.178
no net on Bottom Layer "NONET_L02_P008" (solid, remove dead copper, shelved, pour order 8): 60.579,75.438 62.738,77.597 116.332,77.597 118.491,75.438 118.491,27.305 116.84,25.654 116.84,25.527 63.119,25.527 61.468,27.178 60.579,27.178
no net on Bottom Layer "NONET_L02_P003" (solid, remove dead copper, shelved, pour order 3): 118.618,75.184 115.951,77.851 57.785,77.851 54.991,75.057 54.991,27.432 56.642,25.781 116.459,25.781 116.586,25.654 118.237,27.305 118.491,27.305 118.491,26.797 118.237,26.543 118.237,27.432 58.42,27.432 56.642,25.654
no net on Bottom Layer "NONET_L02_P007" (solid, remove dead copper, shelved, pour order 7): 60.706,75.438 60.706,75.565 62.865,77.724 116.332,77.724 116.332,77.597 118.745,75.184 118.745,27.305 118.618,27.305 116.586,25.273 62.611,25.273 62.611,25.527 60.579,27.559

## Silkscreen, mask and mechanical layers (free items; w line width, h text height)
Mechanical 1:
  lines w0.2: 60.706,74.168 60.706,75.438 62.865,77.597
  lines w0.254: 60.706,32.004 60.706,33.909 60.706,35.052 60.706,75.438 ; 60.706,32.131 62.23,30.607 62.611,30.607 ; 62.738,30.607 116.713,30.607 117.221,30.607 118.745,32.131 118.745,33.655 ; 62.865,77.597 116.332,77.597 118.745,75.184 118.745,33.909 118.745,33.782

## Text inside footprints (layer, text, board x,y; h text height)
D5: Top Overlay "+" at 71.815,74.503 h0.81
D8: Top Overlay "+" at 111.7,73.198 h0.81 r180; Mechanical 13 "+" at 111.7,73.198 h0.81 r180
J2: Mechanical 13 "PCB EDGE" at 118.483,56.858 h0.61 r90
J3: Mechanical 13 "PCB EDGE" at 118.537,45.455 h0.61 r90